# Altium PCB 175-00002 rev 4, PCB, Sinistro Clock Gen.PcbDoc (part 6 of 6)
Units mil, origin at the board's own origin, x right, y up, seen from the top; angles counter-clockwise.
Board outline 5905.51 x 4330.71 mil, 10 copper layers (Top Layer (.GTL), MidLayer1 (*.G1), +12V (*.GP1), -12V (*.GP2), A & GND (*.GP3), Chassis E (*.GP4), +28V & VCC (*.GP5), MidLayer2 (*.G2), MidLayer3 (*.G3), Bottom Layer (.GBL)), stack 64.6 mil thick; 505 components, 332 nets, 1954 pads, 918 vias.
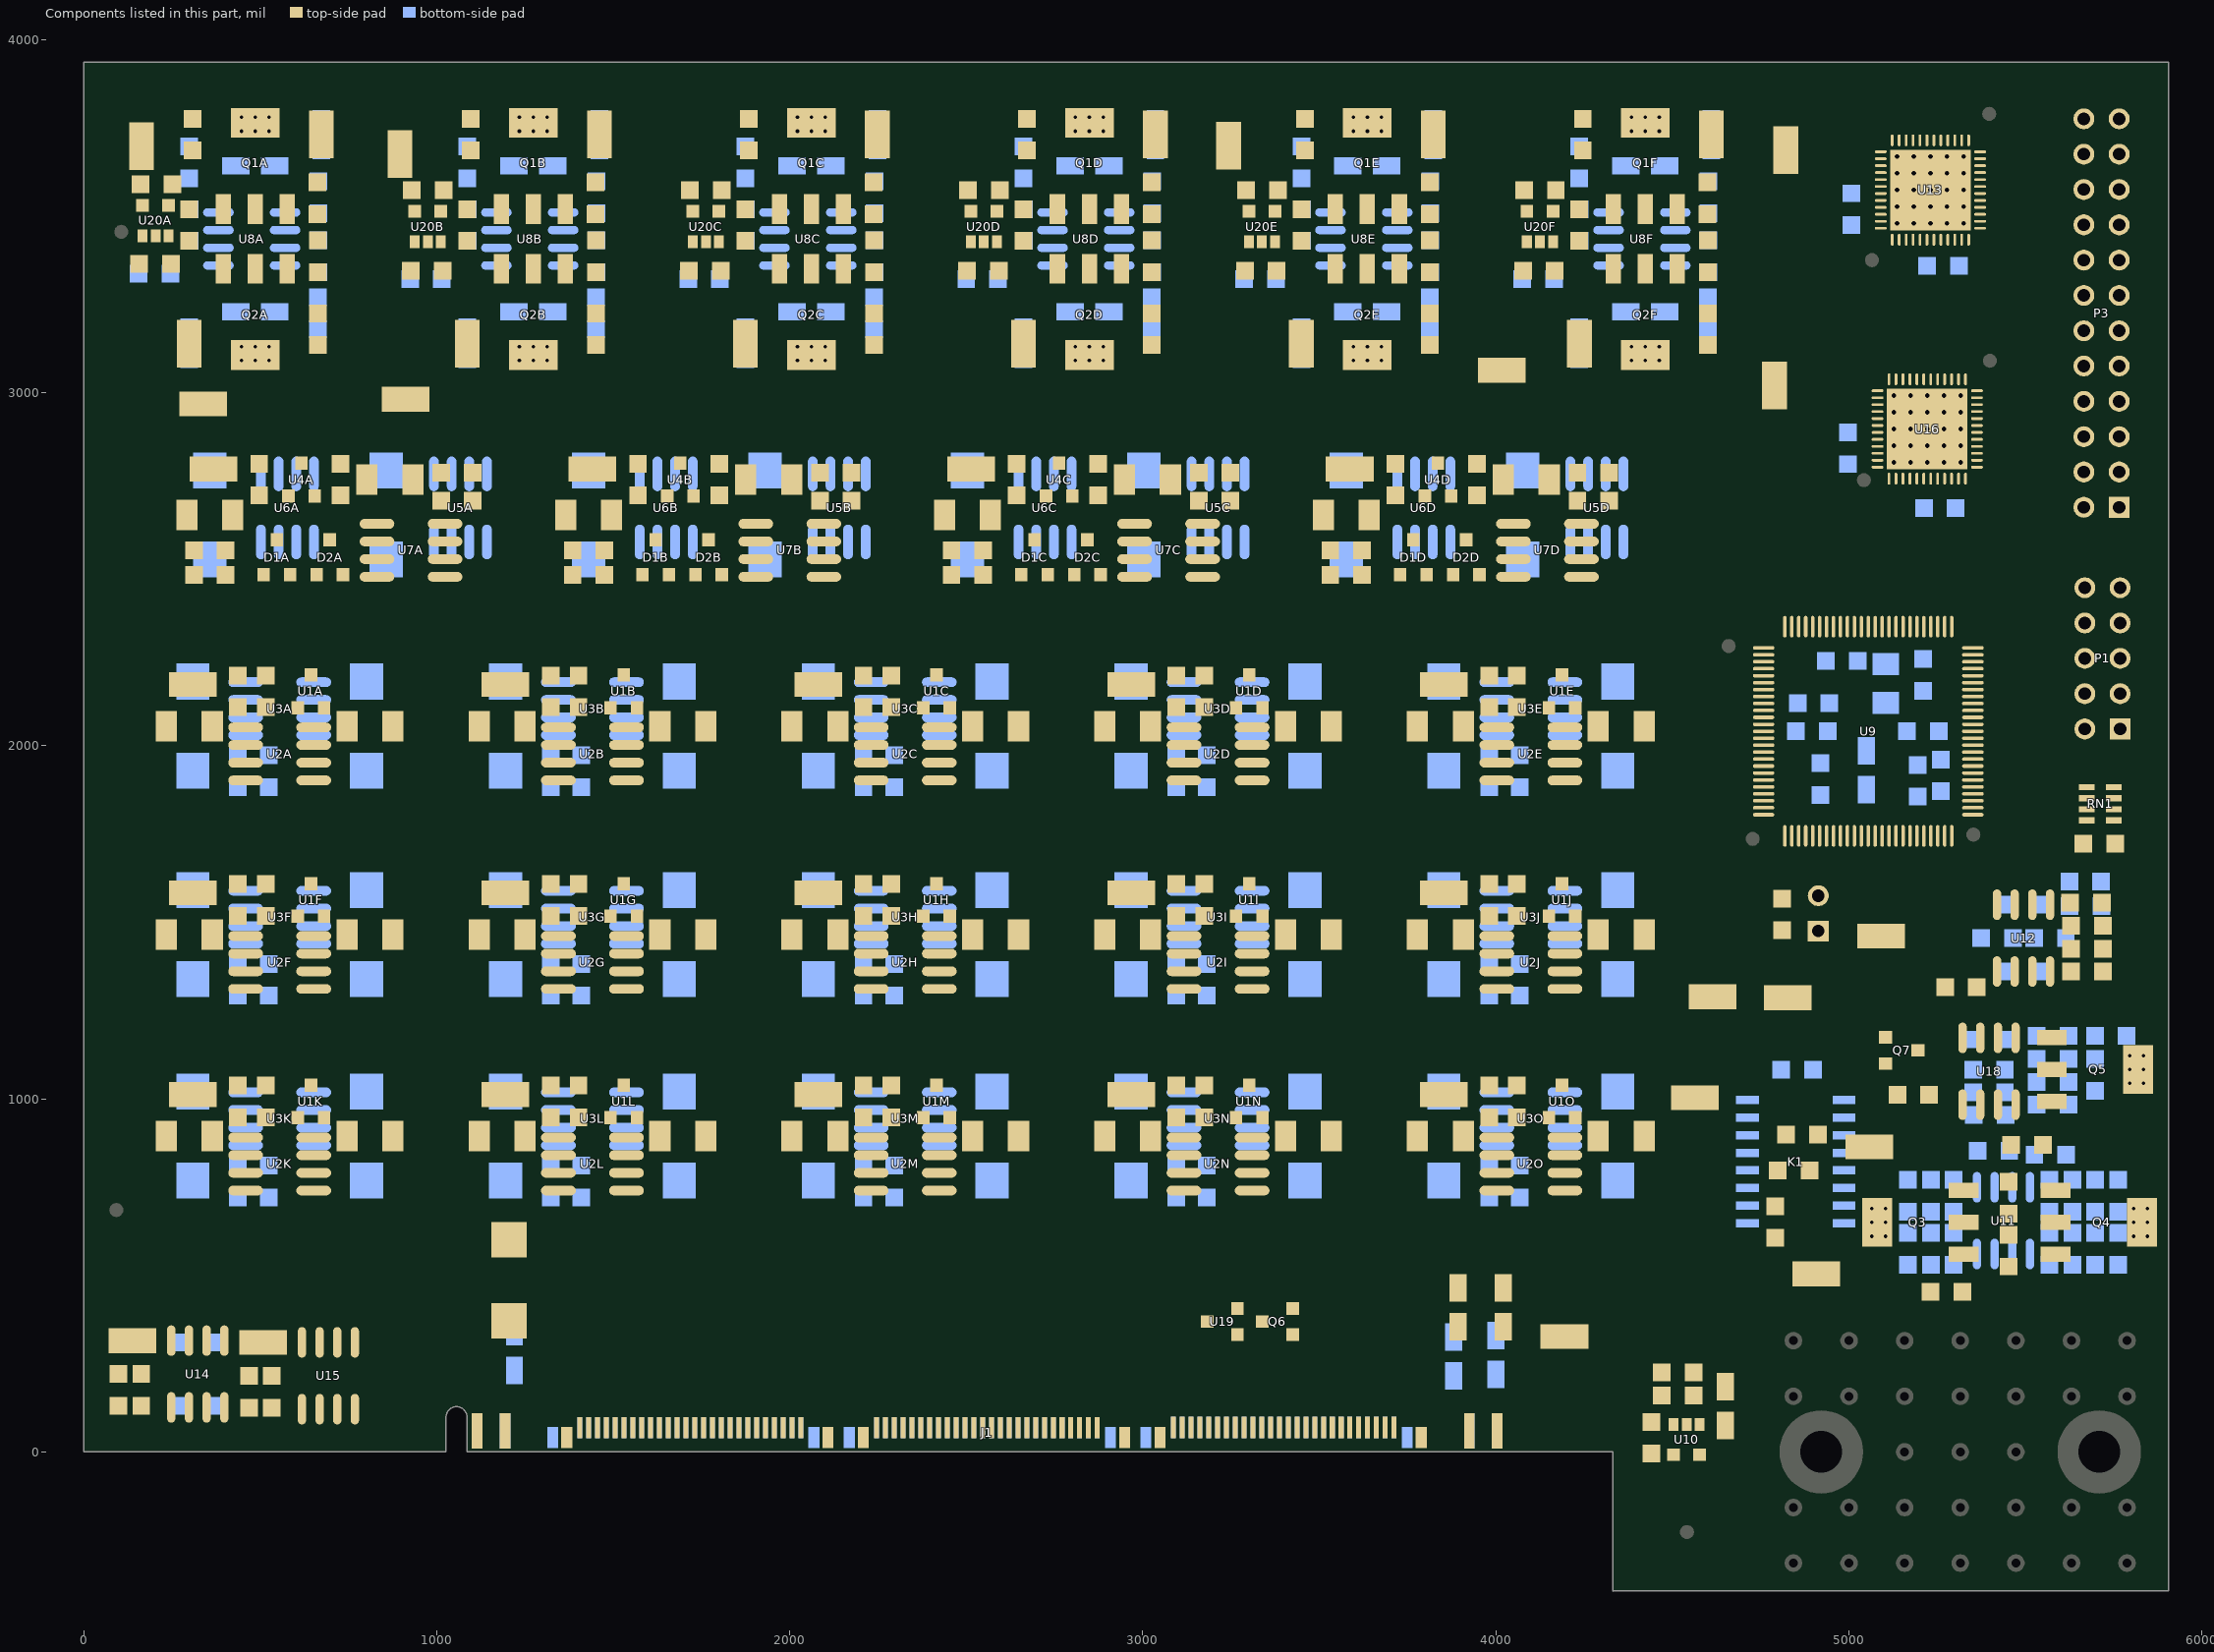
[diagram p14: the components of this part, seen from the top]

## Via types
v1: diameter 24, hole 10, Top Layer (.GTL) to Bottom Layer (.GBL), 918 vias

## Nets (pads, with @x,y where several pads share a name; then routed paths per layer and width w, separated by ;. In a path a pad name is that pad's centre, name@x,y a point inside that pad or via, vN(x,y) a via of type N, cw(c..) or ccw(c..) an arc to the next point about the centre after c; other vN are vias at no path point) (continued)
pads on no net: D1A.2 D1B.2 D1C.2 D1D.2 D2A.2 D2B.2 D2C.2 D2D.2 J1.0 J1.24 J1.26 J1.28 J1.30 J1.34 J1.35 J1.36 J1.37 J1.38 J1.39 J1.40 J1.43 J1.44 J1.45 J1.47 J1.48 J1.50 J1.55 J1.56 J1.57 J1.58 J1.59 J1.60 J1.61 J1.62 J1.65 J1.66 J1.67 J1.68 J1.69 J1.70 J1.71 J1.72 J1.75 J1.76 J1.77 J1.78 J1.79 J1.80 J1.81 J1.82 J1.85 J1.86 J1.87 J1.88 J1.89 J1.90 J1.91 J1.92 J1.96 J1.98 J1.100 J1.102 J1.108 P1.6 P1.7 P1.8 Q1A.2 Q1B.2 Q1C.2 Q1D.2 Q1E.2 Q1F.2 Q2A.2 Q2B.2 Q2C.2 Q2D.2 Q2E.2 Q2F.2 Q3.2 Q4.2 Q5.2 U2A.1 U2A.4 U2A.7 U2B.1 U2B.4 U2B.7 U2C.1 U2C.4 U2C.7 U2D.1 U2D.4 U2D.7 U2E.1 U2E.4 U2E.7 U2F.1 U2F.4 U2F.7 U2G.1 U2G.4 U2G.7 U2H.1 U2H.4 U2H.7 U2I.1 U2I.4 U2I.7 U2J.1 U2J.4 U2J.7 U2K.1 U2K.4 U2K.7 U2L.1 U2L.4 U2L.7 U2M.1 U2M.4 U2M.7 U2N.1 U2N.4 U2N.7 U2O.1 U2O.4 U2O.7 U3A.1 U3A.8 U3B.1 U3B.8 U3C.1 U3C.8 U3D.1 U3D.8 U3E.1 U3E.8 U3F.1 U3F.8 U3G.1 U3G.8 U3H.1 U3H.8 U3I.1 U3I.8 U3J.1 U3J.8 U3K.1 U3K.8 U3L.1 U3L.8 U3M.1 U3M.8 U3N.1 U3N.8 U3O.1 U3O.8 U5A.1 U5A.4 U5A.7 U5B.1 U5B.4 U5B.7 U5C.1 U5C.4 U5C.7 U5D.1 U5D.4 U5D.7 U6A.1 U6A.8 U6B.1 U6B.8 U6C.1 U6C.8 U6D.1 U6D.8 U7A.1 U7A.4 U7A.7 U7B.1 U7B.4 U7B.7 U7C.1 U7C.4 U7C.7 U7D.1 U7D.4 U7D.7 U9.1 U9.2 U9.3 U9.4 U9.5 U9.6 U9.7 U9.8 U9.15 U9.16 U9.17 U9.18 U9.19 U9.20 U9.21 U9.27 U9.28 U9.29 U9.30 U9.33 U9.34 U9.35 U9.36 U9.43 U9.47 U9.48 U9.49 U9.50 U9.91 U9.92 U9.97 U9.98 U9.99 U9.100 U13.3 U13.5 U13.6 U13.16 U13.17 U13.20 U13.21 U13.29 U13.30 U13.31 U13.32 U13.35 U15.1 U15.3 U15.5 U15.7 U15.8 U16.3 U16.5 U16.6 U16.16 U16.17 U16.20 U16.21 U16.29 U16.30 U16.31 U16.32 U16.35
copper on no net: | length 166.9
  Bottom Layer (.GBL) w5: 3465.57,465 ccw(c3439,465) 3465.57,465

## Polygon pours and split planes (outlines as drawn)
E on +12V (*.GP1) (split plane): 5885.42,-373.6 4726.1,-373.6 4726.1,391.89 4730.11,395.9 5885.42,395.9
+12V on +12V (*.GP1) (split plane): 5885.42,406.1 4728,406.1 4726.05,405.71 4724.39,404.6 4717.39,397.6 4716.29,395.95 4715.9,394 4715.9,-373.6 4350.81,-373.6 4350.81,0 4350.42,3.92 4349.28,7.69 4347.42,11.17 4344.92,14.21 4341.88,16.71 4338.4,18.57 4334.63,19.71 4330.71,20.1 1105.9,20.1 1105.9,98.43 1105.86,98.89 1105.57,103.98 1104.64,109.46 1103.1,114.81 1100.97,119.95 1098.28,124.82 1095.06,129.35 1091.35,133.5 1087.21,137.21 1082.67,140.43 1077.8,143.12 1072.66,145.25 1067.32,146.79 1061.83,147.72 1056.28,148.03 1050.72,147.72 1045.24,146.79 1039.89,145.25 1034.75,143.12 1029.89,140.43 1025.35,137.21 1021.2,133.5 1017.49,129.35 1014.27,124.82 1011.58,119.95 1009.45,114.81 1007.91,109.46 1006.98,103.98 1006.8,100.78 1006.78,100.64 1006.77,100.17 1006.69,98.85 1006.65,98.43 1006.65,98.42 1006.65,20.1 20.1,20.1 20.1,3916.1 5885.42,3916.1
E on -12V (*.GP2) (split plane): 5885.42,-373.6 4731.1,-373.6 4731.1,391.9 5885,391.9 5885.42,391.98
-12V on -12V (*.GP2) (split plane): 5885.42,402.02 5885,402.1 4723,402.1 4721.05,401.71 4719.39,400.6 4718.29,398.95 4717.9,397 4718.29,395.05 4719.39,393.4 4720.9,391.89 4720.9,-373.6 4350.81,-373.6 4350.81,0 4350.42,3.92 4349.28,7.69 4347.42,11.17 4344.92,14.21 4341.88,16.71 4338.4,18.57 4334.63,19.71 4330.71,20.1 1105.9,20.1 1105.9,98.43 1105.86,98.89 1105.57,103.98 1104.64,109.46 1103.1,114.81 1100.97,119.95 1098.28,124.82 1095.06,129.35 1091.35,133.5 1087.21,137.21 1082.67,140.43 1077.8,143.12 1072.66,145.25 1067.32,146.79 1061.83,147.72 1056.28,148.03 1050.72,147.72 1045.24,146.79 1039.89,145.25 1034.75,143.12 1029.89,140.43 1025.35,137.21 1021.2,133.5 1017.49,129.35 1014.27,124.82 1011.58,119.95 1009.45,114.81 1007.91,109.46 1006.98,103.98 1006.8,100.78 1006.78,100.64 1006.77,100.17 1006.69,98.85 1006.65,98.43 1006.65,98.42 1006.65,20.1 20.1,20.1 20.1,3916.1 5885.42,3916.1
GND on A & GND (*.GP3) (split plane): 5885.42,239.1 4715,239.1 4713.05,238.71 4711.39,237.6 4710.29,235.95 4709.9,234 4709.9,-373.6 4350.81,-373.6 4350.81,0 4350.42,3.92 4349.28,7.69 4347.42,11.17 4344.92,14.21 4341.88,16.71 4338.4,18.57 4334.63,19.71 4330.71,20.1 1288.09,20.1 1288.09,383.91 3687.91,383.91 3687.91,210 3688.26,207.39 3689.26,204.96 3690.87,202.87 3692.96,201.26 3695.39,200.26 3698,199.91 3700.61,200.26 3703.04,201.26 3705.13,202.87 3705.18,202.91 4183,202.91 4185.61,203.26 4188.04,204.26 4190.13,205.87 4191.73,207.96 4192.74,210.39 4193.09,213 4193.09,387.91 5791,387.91 5793.61,388.26 5796.04,389.26 5798.13,390.87 5799.73,392.96 5800.74,395.39 5801.09,398 5801.09,1495.82 5830.13,1524.87 5831.73,1526.96 5832.32,1528.38 5832.74,1529.39 5833.09,1532 5833.09,1618 5832.74,1620.61 5831.73,1623.04 5830.13,1625.13 5828.04,1626.73 5825.61,1627.74 5823,1628.09 4979,1628.09 4976.39,1627.74 4973.96,1626.73 4971.87,1625.13 4970.87,1624.13 4969.26,1622.04 4968.26,1619.61 4967.91,1617 4968.26,1614.39 4969.26,1611.96 4970.87,1609.87 4972.9,1608.31 4972.9,1530.1 4854.1,1530.1 4854.1,1608 4853.86,1609.19 4854.04,1609.27 4856.13,1610.87 4857.73,1612.96 4858.74,1615.39 4859.09,1618 4858.74,1620.61 4857.73,1623.04 4856.13,1625.13 4854.04,1626.73 4851.61,1627.74 4849,1628.09 4499.09,1628.09 4499.09,2550.91 5885.42,2550.91
E on A & GND (*.GP3) (split plane): 5885.42,-373.6 4720.1,-373.6 4720.1,228.9 5885.42,228.9
A on A & GND (*.GP3) (split plane): 5885.42,2571.09 4489,2571.09 4486.39,2570.74 4483.96,2569.73 4481.87,2568.13 4480.26,2566.04 4479.26,2563.61 4478.91,2561 4478.91,1618 4479.26,1615.39 4480.26,1612.96 4481.87,1610.87 4483.96,1609.27 4486.39,1608.26 4489,1607.91 4843.9,1607.91 4843.9,1525 4844.29,1523.05 4845.39,1521.4 4847.05,1520.29 4849,1519.9 4976,1519.9 4977.95,1520.29 4979.6,1521.4 4980.41,1522.59 4981.6,1523.4 4982.71,1525.05 4983.1,1527 4983.1,1607.91 5812.91,1607.91 5812.91,1536.18 5783.87,1507.13 5782.26,1505.04 5781.26,1502.61 5780.91,1500 5780.91,408.09 4183,408.09 4180.39,407.74 4177.96,406.74 4175.87,405.13 4174.26,403.04 4173.26,400.61 4172.91,398 4172.91,223.09 3708.09,223.09 3708.09,389.82 3709.13,390.87 3710.73,392.96 3711.74,395.39 3712.09,398 3711.74,400.61 3710.73,403.04 3709.13,405.13 3707.04,406.74 3704.61,407.74 3702,408.09 3699.39,407.74 3696.96,406.74 3694.87,405.13 3693.82,404.09 1286.18,404.09 1285.13,405.13 1283.04,406.74 1280.61,407.74 1278,408.09 1275.39,407.74 1272.96,406.74 1270.87,405.13 1269.26,403.04 1268.26,400.61 1267.91,398 1267.91,20.1 1105.9,20.1 1105.9,98.43 1105.86,98.89 1105.57,103.98 1104.64,109.46 1103.1,114.81 1100.97,119.95 1098.28,124.82 1095.06,129.35 1091.35,133.5 1087.21,137.21 1082.67,140.43 1077.8,143.12 1072.66,145.25 1067.32,146.79 1061.83,147.72 1056.28,148.03 1050.72,147.72 1045.24,146.79 1039.89,145.25 1034.75,143.12 1029.89,140.43 1025.35,137.21 1021.2,133.5 1017.49,129.35 1014.27,124.82 1011.58,119.95 1009.45,114.81 1007.91,109.46 1006.98,103.98 1006.8,100.78 1006.78,100.64 1006.77,100.17 1006.69,98.85 1006.65,98.43 1006.65,98.42 1006.65,20.1 20.1,20.1 20.1,3916.1 5885.42,3916.1
Q1_CE on Chassis E (*.GP4) (split plane): 4030.33,3449.98 3253.13,3449.98 3253.13,3833.48 4030.33,3833.48
Q1_CF on Chassis E (*.GP4) (split plane): 4817.74,3449.98 4040.53,3449.98 4040.53,3833.48 4817.74,3833.48
Q1_CD on Chassis E (*.GP4) (split plane): 3242.93,3449.98 2465.73,3449.98 2465.73,3833.48 3242.93,3833.48
Q2_CE on Chassis E (*.GP4) (split plane): 4030.33,3056.28 3253.13,3056.28 3253.13,3439.78 4030.33,3439.78
NetQ5_4 on Chassis E (*.GP4) (split plane): 5885.42,881.1 5376.1,881.1 5376.1,1271.9 5885.42,1271.9
NetQ4_4 on Chassis E (*.GP4) (split plane): 5885.42,412.1 5376.1,412.1 5376.1,870.9 5885.42,870.9
Q2_CF on Chassis E (*.GP4) (split plane): 4817.74,3056.28 4040.53,3056.28 4040.53,3439.78 4817.74,3439.78
NetQ3_4 on Chassis E (*.GP4) (split plane): 5365.9,412.1 4836.1,412.1 4836.1,870.9 5365.9,870.9
Q1_CC on Chassis E (*.GP4) (split plane): 2455.53,3449.98 1678.33,3449.98 1678.33,3833.48 2455.53,3833.48
Q2_CC on Chassis E (*.GP4) (split plane): 2455.53,3056.28 1678.33,3056.28 1678.33,3439.78 2455.53,3439.78
Q1_CA on Chassis E (*.GP4) (split plane): 880.73,3449.98 103.52,3449.98 103.52,3833.48 880.73,3833.48
Q1_CB on Chassis E (*.GP4) (split plane): 1668.13,3449.98 890.92,3449.98 890.92,3833.48 1668.13,3833.48
E on Chassis E (*.GP4) (split plane): 5885.42,1282.1 5371,1282.1 5369.05,1281.71 5367.39,1280.6 5366.29,1278.95 5365.9,1277 5365.9,881.1 4831,881.1 4829.05,880.71 4827.39,879.6 4826.29,877.95 4825.9,876 4825.9,407 4826.29,405.05 4827.39,403.4 4829.05,402.29 4831,401.9 5885.42,401.9 5885.42,-373.6 4350.81,-373.6 4350.81,0 4350.42,3.92 4349.28,7.69 4347.42,11.17 4344.92,14.21 4341.88,16.71 4338.4,18.57 4334.63,19.71 4330.71,20.1 1105.9,20.1 1105.9,98.43 1105.86,98.89 1105.57,103.98 1104.64,109.46 1103.1,114.81 1100.97,119.95 1098.28,124.82 1095.06,129.35 1091.35,133.5 1087.21,137.21 1082.67,140.43 1077.8,143.12 1072.66,145.25 1067.32,146.79 1061.83,147.72 1056.28,148.03 1050.72,147.72 1045.24,146.79 1039.89,145.25 1034.75,143.12 1029.89,140.43 1025.35,137.21 1021.2,133.5 1017.49,129.35 1014.27,124.82 1011.58,119.95 1009.45,114.81 1007.91,109.46 1006.98,103.98 1006.8,100.78 1006.78,100.64 1006.77,100.17 1006.69,98.85 1006.65,98.43 1006.65,98.42 1006.65,20.1 20.1,20.1 20.1,3916.1 5885.42,3916.1
Q2_CD on Chassis E (*.GP4) (split plane): 3242.93,3056.28 2465.73,3056.28 2465.73,3439.78 3242.93,3439.78
Q2_CA on Chassis E (*.GP4) (split plane): 880.73,3056.28 103.52,3056.28 103.52,3439.78 880.73,3439.78
Q2_CB on Chassis E (*.GP4) (split plane): 1668.13,3056.28 890.92,3056.28 890.92,3439.78 1668.13,3439.78
+28V on +28V & VCC (*.GP5) (split plane): 5885.42,253.09 4721.89,253.09 4721.04,253.74 4718.61,254.74 4716,255.09 4713.39,254.74 4710.96,253.74 4710.11,253.09 1077.09,253.09 1077.09,330.11 1077.73,330.96 1078.74,333.39 1079.09,336 1079.09,361.91 4714,361.91 4716.61,362.26 4719.04,363.26 4721.13,364.87 4723.13,366.87 4724.73,368.96 4725.32,370.38 4725.74,371.39 4726.09,374 4726.09,1334.91 5885.42,1334.91
E on +28V & VCC (*.GP5) (split plane): 5885.42,-373.6 4723.1,-373.6 4723.1,232.91 5885.42,232.91
VCC on +28V & VCC (*.GP5) (split plane): 5885.42,1355.09 4716,1355.09 4713.39,1354.74 4710.96,1353.73 4708.87,1352.13 4707.26,1350.04 4706.26,1347.61 4705.91,1345 4705.91,382.09 1073.19,382.09 1071.61,382.74 1069,383.09 1066.39,382.74 1063.96,381.74 1061.87,380.13 1060.26,378.04 1059.26,375.61 1058.91,373 1058.91,340.89 1058.26,340.04 1057.26,337.61 1056.91,335 1056.91,243 1057.26,240.39 1058.26,237.96 1059.87,235.87 1061.96,234.26 1064.39,233.26 1067,232.91 4712.9,232.91 4712.9,-373.6 4350.81,-373.6 4350.81,0 4350.42,3.92 4349.28,7.69 4347.42,11.17 4344.92,14.21 4341.88,16.71 4338.4,18.57 4334.63,19.71 4330.71,20.1 1105.9,20.1 1105.9,98.43 1105.86,98.89 1105.57,103.98 1104.64,109.46 1103.1,114.81 1100.97,119.95 1098.28,124.82 1095.06,129.35 1091.35,133.5 1087.21,137.21 1082.67,140.43 1077.8,143.12 1072.66,145.25 1067.32,146.79 1061.83,147.72 1056.28,148.03 1050.72,147.72 1045.24,146.79 1039.89,145.25 1034.75,143.12 1029.89,140.43 1025.35,137.21 1021.2,133.5 1017.49,129.35 1014.27,124.82 1011.58,119.95 1009.45,114.81 1007.91,109.46 1006.98,103.98 1006.8,100.78 1006.78,100.64 1006.77,100.17 1006.69,98.85 1006.65,98.43 1006.65,98.42 1006.65,20.1 20.1,20.1 20.1,3916.1 5885.42,3916.1

## Other copper
Top Layer (.GTL):
  rectangle net E: 4724.41,-393.7 5905.51,393.7
  text "*.GTL - TOP LAYER GERBER DATA" at 1372,-1734.01 h80
MidLayer1 (*.G1):
  text "*.G1 - MID LAYER 1 GERBER DATA" at 1372,-1734.01 h80
MidLayer2 (*.G2):
  text "*.G2 - MID LAYER 2 GERBER DATA" at 1372,-1734.01 h80
MidLayer3 (*.G3):
  text "*.G3 - MID LAYER 3 GERBER DATA" at 1372,-1734.01 h80
Bottom Layer (.GBL):
  rectangle net E: 4724.41,-393.7 5905.51,393.7
  text "175-00002 Rev 4, SINISTRO CLK BOARD" at 3518.81,517.22 h30
  text "Las Cumbres Observatory" at 3205,458 h30
  text "c  2013" at 3451,454 h30
  text "*.GBL - BOTTOM LAYER GERBER DATA" at 1372,-1734.01 h80
+12V (*.GP1) (plane layer: these items are gaps in the copper):
  lines w10: 4721,-394.51 4721,394 4728,401 5901.51,401 5905.51,405
  text "*.GP1 - INTERNAL PLANE LAYER 1 GERBER DATA" at 1372,-1734.01 h80
-12V (*.GP2) (plane layer: these items are gaps in the copper):
  lines w10: 4726,-394.51 4726,394 4723,397 5885,397
  text "*.GP2 - INTERNAL PLANE LAYER 2 GERBER DATA" at 1372,-1734.01 h80
Chassis E (*.GP4) (plane layer: these items are gaps in the copper):
  lines w10: 5371,407 5371,1277 5898.51,1277 5905.51,1284 ; 5890,876 4831,876 4831,407 5899.51,407 ; 98.43,3444.88 98.43,3838.58 885.83,3838.58 ; 98.43,3444.88 98.43,3051.18 885.83,3051.18 ; 98.43,3444.88 885.83,3444.88 ; 885.83,3051.18 1673.23,3051.18 ; 885.83,3051.18 885.83,3444.88 ; 885.83,3444.88 885.83,3838.58 ; 885.83,3444.88 1673.23,3444.88 ; 885.83,3838.58 1673.23,3838.58 ; 1673.23,3051.18 2460.63,3051.18 ; 1673.23,3051.18 1673.23,3444.88 ; 1673.23,3444.88 1673.23,3838.58 ; 1673.23,3444.88 2460.63,3444.88 ; 1673.23,3838.58 2460.63,3838.58 ; 2460.63,3051.18 3248.03,3051.18 ; 2460.63,3051.18 2460.63,3444.88 ; 2460.63,3444.88 2460.63,3838.58 ; 2460.63,3444.88 3248.03,3444.88 ; 2460.63,3838.58 3248.03,3838.58 ; 3248.03,3051.18 4035.43,3051.18 ; 3248.03,3051.18 3248.03,3444.88 ; 3248.03,3444.88 3248.03,3838.58 ; 3248.03,3444.88 4035.43,3444.88 ; 3248.03,3838.58 4035.43,3838.58 ; 4035.43,3051.18 4822.83,3051.18 4822.83,3444.88 ; 4035.43,3051.18 4035.43,3444.88 ; 4035.43,3444.88 4035.43,3838.58 ; 4035.43,3444.88 4822.83,3444.88 ; 4035.43,3838.58 4822.83,3838.58 4822.83,3444.88
  text "*.GP4 - INTERNAL PLANE LAYER 4 GERBER DATA" at 1372,-1734.01 h80
A & GND (*.GP3) (plane layer: these items are gaps in the copper):
  lines w7: 4976,1525 4978,1527 ; 4978,1617 4979,1618
  lines w10: 4715,-394.51 4715,234 5905.51,234 ; 4976,1525 4849,1525 ; 4978,1527 4978,1617 ; 4849,1525 4849,1608 4849,1525
  lines w20: 1278,0 1278,398 1282,394 3698,394 ; 3702,398 3698,394 ; 4849,1618 4489,1618 4489,2561 5905.51,2561 ; 4978,1617 4979,1618 5823,1618 5823,1532 5791,1500 5791,398 4183,398 4183,213 3701,213 3698,210 3698,394 ; 5903.51,1617 5905.51,1619 ; 5903.51,1617 5905.51,1619 ; 5903.51,1617 5905.51,1619
  text "*.GP3- INTERNAL PLANE LAYER 3 GERBER DATA" at 1372,-1734.01 h80
+28V & VCC (*.GP5) (plane layer: these items are gaps in the copper):
  lines w10: 4718,243 4718,-376 4721,-379
  lines w20: 1067,335 1067,243 4718,243 ; 1068,335 1069,336 1069,373 1070,372 4714,372 4716,374 4716,1345 5903.51,1345 5905.51,1343 ; 5899.51,243 4718,243 ; 4716,245 4718,243 ; 4716,245 4718,243 ; 4716,245 4718,243
  text "*.GP5- INTERNAL PLANE LAYER 5 GERBER DATA" at 1372,-1734.01 h80

## Silkscreen, mask and mechanical layers (free items; w line width, h text height)
Top Overlay:
  rectangle: 2403,275 2643,440
  text "AGND" at 3209,3796.03 h30
  text "AGND" at 111,3787 h30
  text "AGND" at 4801,3768 h30
  text "AGND" at 839,3755 h30
  text "+5ANA" at 3941,3113.42 h30
  text "DGND" at 4739,3106 h30
  text "-12V" at 849,3027 h30
  text "+12V" at 279,3012 h30
  text "JTAG" at 5574,1982 h50 r90
  text "D" at 4989,1562 h30
  text "VCC" at 5047,1510 h30
  text "A" at 4985,1464 h30
  text "+28V" at 4773,1334 h30
  text "780-00002, SCH, SINISTRO CLOCK GEN." at 1783,497 h60
  text "-5ANA" at 4110,384 h30
  text "SCH Rev" at 1961,327 h60
  text "*.GTO - TOP OVERLAY GERBER DATA" at 1372,-1734.01 h80
Bottom Overlay:
  text "*GBO BOTTOM OVERLAY GERBER DATA" at 1372,-1734.01 h80
Top Paste:
  text "*.GTP - TOP-SIDE SOLDER PASTE MASK" at 1371.99,-1734.02 h80
Bottom Paste:
  text "*.GBP - BOTTOM-SIDE SOLDER PASTE MASK" at 1371.99,-1734.02 h80
Top Solder:
  rectangle: 4724.41,-393.7 5905.51,393.7
  text "*.GTS - TOP SOLDER MASK GERBER DATA" at 1372,-1734.01 h80
Bottom Solder:
  rectangle: 4724.41,-393.7 5905.51,393.7
  rectangle: 2474,420 3573,583
  text "*.GBS - BOTTOM SOLDER MASK GERBER DATA" at 1372,-1734.01 h80
Mechanical 1:
  lines w29.53: 811.02,0 0,0 0,3936.2 4724.41,3936.2 5905.51,3936.2 5905.51,-393.7 4330.71,-393.7 ; 4330.71,-394.51 4330.71,0
Mechanical 2:
  lines w10: -7631,-8396 13369,-8396 13369,7604 -7631,7604 -7631,-8396 ; 9314,-8290 ccw(c9364,-8290) 9364,-8340 9694,-8340 ccw(c9694,-8300) 9734,-8300 9734,-8130 ccw(c9694,-8130) 9694,-8090 9314,-8090 9314,-8290 ; 9314,-8000 ccw(c9364,-8000) 9364,-8050 13264,-8050 ccw(c13264,-8000) 13314,-8000 13314,-7810 ccw(c13264,-7810) 13264,-7760 9314,-7760 9314,-8000 ; 9314,-7670 ccw(c9364,-7670) 9364,-7720 11244,-7720 ccw(c11244,-7670) 11294,-7670 11294,-7520 ccw(c11244,-7520) 11244,-7470 9314,-7470 9314,-7670 ; 9314,-7390 ccw(c9354,-7390) 9354,-7430 10164,-7430 ccw(c10164,-7380) 10214,-7380 10214,-7230 ccw(c10164,-7230) 10164,-7180 9314,-7180 9314,-7390 ; 9774,-8300 ccw(c9814,-8300) 9814,-8340 11774,-8340 ccw(c11774,-8300) 11814,-8300 11814,-8130 ccw(c11774,-8130) 11774,-8090 9774,-8090 9774,-8300 ; 10254,-7380 ccw(c10304,-7380) 10304,-7430 11244,-7430 ccw(c11244,-7380) 11294,-7380 11294,-7230 ccw(c11244,-7230) 11244,-7180 10254,-7180 10254,-7380 ; 11334,-7670 ccw(c11384,-7670) 11384,-7720 13264,-7720 ccw(c13264,-7670) 13314,-7670 13314,-7520 ccw(c13264,-7520) 13264,-7470 11334,-7470 11334,-7670 ; 11334,-7380 ccw(c11384,-7380) 11384,-7430 12324,-7430 ccw(c12324,-7380) 12374,-7380 12374,-7230 ccw(c12324,-7230) 12324,-7180 11334,-7180 11334,-7380 ; 11854,-8290 ccw(c11904,-8290) 11904,-8340 12234,-8340 ccw(c12234,-8300) 12274,-8300 12274,-8130 ccw(c12234,-8130) 12234,-8090 11854,-8090 11854,-8290 ; 12314,-8300 ccw(c12354,-8300) 12354,-8340 13264,-8340 ccw(c13264,-8290) 13314,-8290 13314,-8140 ccw(c13264,-8140) 13264,-8090 12314,-8090 12314,-8300 ; 12414,-7380 ccw(c12464,-7380) 12464,-7430 13264,-7430 ccw(c13264,-7380) 13314,-7380 13314,-7230 ccw(c13264,-7230) 13264,-7180 12414,-7180 12414,-7380
  lines w14: -6891,-3333 -2381,-3333 ; -6891,-3085.3 -2381,-3085.3 ; -6951,-5745 ccw(c-6871,-5745) -6871,-5825 -2401,-5825 ccw(c-2401,-5745) -2321,-5745 -2321,-2923 ccw(c-2401,-2923) -2401,-2843 -6871,-2843 ccw(c-6871,-2923) -6951,-2923 -6951,-5745
  lines w20: -7610.94,-7750.12 cw(c-7561,-7825) -7561,-7735 -7101,-7735 cw(c-7101,-7825) -7011,-7825 -7011,-7875 ccw(c-7001,-7875) -7001,-7885 -4361,-7885 cw(c-4361,-7975) -4271,-7975 -4271,-8315 cw(c-4361,-8315) -4286.12,-8364.94 ; 9270.17,-8379.98 cw(c9364,-8290) 9234,-8290 9234,-6620 cw(c9364,-6620) 9364,-6490 13264,-6490 cw(c13264,-6620) 13352.66,-6524.92 ; -7611,-8315 ccw(c-7561,-8315) -7561,-8365 -4361,-8365 ccw(c-4361,-8315) -4311,-8315 -4311,-7975 ccw(c-4361,-7975) -4361,-7925 -7001,-7925 cw(c-7001,-7875) -7051,-7875 -7051,-7825 ccw(c-7101,-7825) -7101,-7775 -7561,-7775 ccw(c-7561,-7825) -7611,-7825 -7611,-8315 ; -101,-8216 ccw(c29,-8216) 29,-8346 4769,-8346 ccw(c4769,-8216) 4899,-8216 4899,-6626 ccw(c4769,-6626) 4769,-6496 29,-6496 ccw(c29,-6626) -101,-6626 -101,-8216 ; 9274,-8290 ccw(c9364,-8290) 9364,-8380 13264,-8380 ccw(c13264,-8290) 13354,-8290 13354,-6620 ccw(c13264,-6620) 13264,-6530 9364,-6530 ccw(c9364,-6620) 9274,-6620 9274,-8290
  lines w24: 2449,-8186 2599,-8186 ; 2449,-7936 2599,-7936 ; 2449,-7686 2599,-7686 ; 2449,-7436 2599,-7436 ; 2449,-7186 2599,-7186
  lines w30: -8131,-8896 13869,-8896 13869,8104 -8131,8104 -8131,-8896
  lines w50: 9459,-7031 11109,-7031 ; 9459,-6651 11109,-6651 ; 11109,-7031 9449,-7031 9449,-6651 11109,-6651 ; 11109,-7031 11109,-6651
  text "NOTES (UNLESS OTHERWISE SPECIFIED):" at -7311,7080 h90
  text "GENERAL" at -7211,6880 h90
  text "1)" at -7111,6679.95 h75
  text "PCB IS 10-LAYER, .062\" THICK." at -6911,6679.97 h75
  text "2)" at -7111,6529.95 h75
  text "CONSTRUCTION IS SOLDER-MASK-OVER-BARE-COPPER (SMOBC)." at -6911,6529.95 h75
  text "3)" at -7111,6379.95 h75
  text "ACCEPTABILITY SHALL BE BASED ON IPC-A-600, CLASS 2." at -6911,6379.95 h75
  text "4)" at -7111,6229.95 h75
  text "THE FOLLOWING GERBER RS274X PHOTO TOOL FILES SHALL BE USED TO DEFINE ALL CIRCUIT FEATURES:" at -6911,6229.95 h75
  text "*.GTL - TOP LAYER GERBER DATA" at -6737,6040 h80
  text "*.G1 - MID LAYER 1 GERBER DATA" at -6737,5849.73 h80
  text "*.GP1- INTERNAL PLANE LAYER 1 GERBER DATA" at -6737,5659.47 h80
  text "*.GP2 - INTERNAL PLANE LAYER 2 GERBER DATA" at -6737,5469.2 h80
  text "*.GP3- INTERNAL PLANE LAYER 3 GERBER DATA" at -6737,5278.93 h80
  text "*.GP4 - INTERNAL PLANE LAYER 4 GERBER DATA" at -6737,5088.67 h80
  text "*.GP5 - INTERNAL PLANE LAYER 5 GERBER DATA" at -6737,4898.4 h80
  text "*.G2 - MID LAYER 2 GERBER DATA" at -6737,4708.13 h80
  text "*.G3 - MID LAYER 3 GERBER DATA" at -6737,4517.87 h80
  text "*.GBL - BOTTOM LAYER GERBER DATA" at -6737,4327.6 h80
  text "*GBO - BOTTOM OVERLAY GERBER DATA" at -6737,4137.33 h80
  text "*.GBP - BOTTOM-SIDE SOLDER PASTE MASK" at -6737.01,3947.06 h80
  text "*.GBS - BOTTOM SOLDER MASK GERBER DATA" at -6737,3756.8 h80
  text "*.GTO - TOP OVERLAY GERBER DATA" at -6737,3566.53 h80
  text "*.GTP - TOP-SIDE SOLDER PASTE MASK" at -6737.01,3376.26 h80
  text "*.GTS - TOP SOLDER MASK GERBER DATA" at -6737,3186 h80
  text "5)" at -7173,2964.23 h75
  text "THE PHOTO TOOL SHALL NOT BE COMPENSATED WITHOUT PRIOR ENGINEERING APPROVAL." at -6973,2964.23 h75
  text "PCB DESIGNER: RICH LOBDILL   PH (805) 880-1621  FAX (805) 961-1792." at -6973,2814.28 h75
  text "FABRICATION TOLERANCES" at -7153,2522 h90
  text "6)" at -7053,2321.95 h75
  text "END PRODUCT CONDUCTOR WIDTHS AND PAD DIAMETERS SHALL NOT VARY MORE THAN" at -6853,2321.95 h75
  text "0.002\" FROM THE 1:1 DIMENSIONS OF THE MASTER ARTWORK." at -6853,2172 h75
  text "7)" at -7053,2021.95 h75
  text "THE CONDUCTIVE PATTERN SHALL BE POSITIONED SO THAT THE LOCATION OF ANY PAD OR" at -6853,2021.95 h75
  text "LAND SHALL BE WITHIN 0.005\" DIAMETER TO THE TRUE POSITION OF THE HOLE IT CIRCUMSCRIBES." at -6853,1872 h75
  text "8.1)" at -7078,1741 h75
  text "DRILL TOLERANCES +/- 0.003\"" at -6851,1733 h75
  text "8.2)" at -7090,1597 h75
  text "ALL DRILL HOLE SIZES AND TOLERANCES APPLY AFTER PLATING." at -6853,1589.95 h75
  text "9)" at -7053,1439.95 h75
  text "THE MINIMUM ANNULAR RING SHALL BE 0.005\"." at -6853,1439.95 h75
  text "10)" at -7108,1289.95 h75
  text "BOW AND TWIST SHALL NOT EXCEED 0.010\" PER INCH." at -6853,1289.95 h75
  text "11)" at -7098,1139.95 h75
  text "FOR PCB ROUTING DIMENSIONS: .XXX = +/-.005\"  .XX = +/-.020\"" at -6853,1139.95 h75
  text "MATERIAL" at -7153,940 h90
  text "12)" at -7108,739.95 h75
  text "BASE MATERIAL IS FR4 EPOXY FIBERGLASS" at -6846,734 h75
  text "SEE STACK-UP LEGEND FOR COPPER CLADDING CALL OUTS" at -6846,594 h75
  text "13)" at -7108,589.95 h75
  text "PLATING" at -7153,390 h90
  text "14)" at -7108,194.95 h75
  text "ALL HOLES AND CONDUCTIVE SURFACES SHALL BE PLATED WITH A MINIMUM OF 0.001\" COPPER." at -6853,194.95 h75
  text "15)" at -7108,44.95 h75
  text "AFTER SOLDERMASK, ALL EXPOSED HOLES AND CONDUCTIVE SURFACES SHALL BE COATED" at -6853,44.95 h75
  text "WITH A GOLD IMMERSION PLATING TO PRESERVE SOLDERABILITY." at -6846,-106 h75
  text "COATINGS" at -7153,-305 h90
  text "16)" at -7103,-500.05 h75
  text "THE SOLDERMASK SHALL BE BLACK LIQUID PHOTO-IMAGEABLE PER IPC-SM-840, TYPE-B, CLASS 2." at -6853,-500.05 h75
  text "17)" at -7108,-650.05 h75
  text "THE SOLDERMASK REGISTRATION ALLOWANCE IS 0.003\".  THERE SHALL BE NO SOLDERMASK ON" at -6853,-650.05 h75
  text "ANY SOLDER PAD OR LAND." at -6853,-800.05 h75
  text "MARKING" at -7153,-1000 h90
  text "18)" at -7108,-1195.05 h75
  text "THE LEGEND SHALL BE SCREEN-PRINTED USING PERMANENT YELLOW EPOXY INK." at -6853,-1195.05 h75
  text "19)" at -7108,-1345.05 h75
  text "THE SCREEN PRINTING REGISTRATION ALLOWANCE IS 0.007\".  THERE SHALL BE NO INK ON ANY" at -6853,-1345.05 h75
  text "SOLDER PAD OR LAND." at -6853,-1495 h75
  text "20)" at -7118,-1645.05 h75
  text "THE VENDOR CODE AND UL FLAMMABILITY RATING MAY BE ETCHED IN THE FOIL OR MARKED IN" at -6853,-1645.05 h75
  text "PERMANENT EPOXY INK (VENDOR'S OPTION)." at -6853,-1795 h75
  text "ELECTRICAL TESTING" at -7153,-1995 h90
  text "21)" at -7108,-2190.05 h75
  text "ALL BOARDS SHALL BE ELECTRICALLY TESTED TO THE SUPPLIED IPC-D-356A NET LIST" at -6853,-2190.05 h75
  text "FOR CONTINUITY, OPENS AND SHORTS." at -6853,-2340 h75
  text "Layer Stack Up Detail for: 780-00002 rev 4" at -6891,-3026.75 h87
  text "Layer" at -6891,-3177.8 h57
  text "Copper cladding" at -4860,-3237 h75
  text "Name" at -6891,-3291.8 h57
  text "Top Layer (.GTL)" at -6891,-3454.25 h80
  text "1/2 oz. (1 oz. Finished)" at -4803,-3482 h80
  text "1/2 oz" at -4794,-3665 h80
  text "MidLayer1 (*.G1)" at -6891,-3682.75 h80
  text "1/2 oz" at -4794,-3886 h80
  text "+12V (*.GP1)" at -6891,-3911.25 h80
  text "1/2 oz" at -4766,-4079 h80
  text "-12V (*.GP2)" at -6891,-4139.75 h80
  text "1/2 oz" at -4766,-4333 h80
  text "A & GND (*.GP3)" at -6891,-4368.25 h80
  text "2 oz." at -4991,-4577 h80
  text "Chassis E (*.GP4)" at -6891,-4596.75 h80
  text "2 oz." at -4987,-4822 h80
  text "+28V & VCC (*.GP5)" at -6891,-4825.25 h80
  text "1/2 oz" at -4803,-5028 h80
  text "MidLayer2 (*.G2)" at -6891,-5053.75 h80
  text "MidLayer3 (*.G3)" at -6891,-5282.25 h80
  text "1/2 oz" at -4808,-5301 h80
  text "Bottom Layer (.GBL)" at -6891,-5510.75 h80
  text "1/2 oz. (1 oz. Finished)" at -4789,-5513 h80
  text "Las Cumbres Observatory, Inc." at 11279,-6671 h90
  text "Las Cumbres Observatory" at 9509,-6791 h150
  text "PRIMARY PCB SPECIFICATIONS" at 346,-6806 h200
  text "6740 Cortona Dr." at 11719,-6825 h90
  text "Global Telescope Network" at 9669,-6951 h125
  text "Goleta, CA 93117" at 11669,-6975 h90
  text "(REFER TO COMPLETE SPEC LISTING AT LEFT FOR FURTHER DETAILS)" at -1,-7011 h100
  text "www.lcogt.net" at 11809,-7121 h90
  text "DATE" at 9334,-7231.8 h32
  text "DESIGNED" at 10274,-7231.8 h32
  text "DRAWN" at 11354,-7231.8 h32
  text "SCALE" at 12434,-7231.8 h32
  text "NUMBER OF LAYERS" at 99,-7261 h150
  text "10" at 3649,-7261.02 h150
  text "Rich Lobdill" at 11659,-7331 h55
  text "Rich Lobdill" at 10534,-7336 h55
  text "1 : 1" at 12719,-7350 h90
  text "1/2/2013" at 9364,-7357 h90
  text "FINISHED THICKNESS" at 99,-7511 h150
  text ".062\"" at 3474,-7511 h150
  text "CHECKED/DATE" at 9334,-7521.8 h32
  text "APPROVED/DATE" at 11354,-7521.8 h32
  text "BASE MATERIAL" at 99,-7761 h150
  text "FR4" at 3399,-7761 h150
  text "TITLE" at 9334,-7811.8 h32
  text "NOTICE" at -7556,-7920 h100
  text "175-00002, CLOCK BOARD" at 9554,-7956 h100
  text "GOLD IMMERSION" at 2905,-7978 h150
  text "PLATING TYPE" at 99,-8011 h150
  text "THIS DRAWING EMBODIES A PROPRIETARY DESIGN OWNED BY LAS CUMBRES" at -7521,-8035 h60
  text "OBSERVATORY.  IT IS SUBMITTED FOR A SPECIFIC PURPOSE UNDER A CON-" at -7521,-8135 h60
  text "SIZE" at 9334,-8141.8 h32
  text "DOC NO." at 9794,-8141.8 h32
  text "REV" at 11874,-8141.8 h32
  text "SHEET" at 12334,-8141.8 h32
  text "FIDENTIAL RELATIONSHIP, AND EXCEPT FOR PURPOSES EXPRESSLY GRANTED" at -7521,-8230 h60
  text "OF" at 12764,-8245 h60
  text "SOLDER MASK COLOR" at 99,-8261 h150
  text "BLACK" at 3524,-8261 h150
  text "1" at 12594,-8265 h100
  text "20" at 12994,-8265 h100
  text "4" at 12019,-8278 h130
  text "-" at 10349,-8280 h130
  text "GPT" at 11068.72,-8294.8 h130
  text "C" at 9469,-8296 h100
  text "IN WRITING, ALL RIGHTS ARE RESERVED BY LAS CUMBRES OBSERVATORY." at -7521,-8320 h60
Mechanical 5:
  text "175-00002 rev4, CLOCK BOARD" at 1644.03,-1236.42 h80
  text "LAS CUMBRES OBSERVATORY     1/2/2013" at 1644.03,-1386.43 h80
Mechanical 13:
  lines w10: 1056.28,-94.72 1056.28,68
Drill Drawing:
  lines w10: -7631,-8396 13369,-8396 13369,7604 -7631,7604 -7631,-8396 ; 9314,-8290 ccw(c9364,-8290) 9364,-8340 9694,-8340 ccw(c9694,-8300) 9734,-8300 9734,-8130 ccw(c9694,-8130) 9694,-8090 9314,-8090 9314,-8290 ; 9314,-8000 ccw(c9364,-8000) 9364,-8050 13264,-8050 ccw(c13264,-8000) 13314,-8000 13314,-7810 ccw(c13264,-7810) 13264,-7760 9314,-7760 9314,-8000 ; 9314,-7680 ccw(c9354,-7680) 9354,-7720 10774,-7720 ccw(c10774,-7670) 10824,-7670 10824,-7520 ccw(c10774,-7520) 10774,-7470 9314,-7470 9314,-7680 ; 9774,-8300 ccw(c9814,-8300) 9814,-8340 11774,-8340 ccw(c11774,-8300) 11814,-8300 11814,-8130 ccw(c11774,-8130) 11774,-8090 9774,-8090 9774,-8300 ; 10864,-7670 ccw(c10914,-7670) 10914,-7720 12324,-7720 ccw(c12324,-7670) 12374,-7670 12374,-7520 ccw(c12324,-7520) 12324,-7470 10864,-7470 10864,-7670 ; 11854,-8290 ccw(c11904,-8290) 11904,-8340 12234,-8340 ccw(c12234,-8300) 12274,-8300 12274,-8130 ccw(c12234,-8130) 12234,-8090 11854,-8090 11854,-8290 ; 12314,-8300 ccw(c12354,-8300) 12354,-8340 13264,-8340 ccw(c13264,-8290) 13314,-8290 13314,-8140 ccw(c13264,-8140) 13264,-8090 12314,-8090 12314,-8300 ; 12414,-7670 ccw(c12464,-7670) 12464,-7720 13264,-7720 ccw(c13264,-7670) 13314,-7670 13314,-7520 ccw(c13264,-7520) 13264,-7470 12414,-7470 12414,-7670
  lines w20: -7605.94,-7765.12 cw(c-7556,-7840) -7556,-7750 -7096,-7750 cw(c-7096,-7840) -7006,-7840 -7006,-7890 ccw(c-6996,-7890) -6996,-7900 -4356,-7900 cw(c-4356,-7990) -4266,-7990 -4266,-8330 cw(c-4356,-8330) -4281.12,-8379.94 ; 9268.92,-8378.66 cw(c9364,-8290) 9234,-8290 9234,-7470 cw(c9314,-7470) 9314,-7390 13264,-7390 cw(c13264,-7520) 13352.66,-7424.92 ; -7606,-8330 ccw(c-7556,-8330) -7556,-8380 -4356,-8380 ccw(c-4356,-8330) -4306,-8330 -4306,-7990 ccw(c-4356,-7990) -4356,-7940 -6996,-7940 cw(c-6996,-7890) -7046,-7890 -7046,-7840 ccw(c-7096,-7840) -7096,-7790 -7556,-7790 ccw(c-7556,-7840) -7606,-7840 -7606,-8330 ; 9274,-8290 ccw(c9364,-8290) 9364,-8380 13264,-8380 ccw(c13264,-8290) 13354,-8290 13354,-7520 ccw(c13264,-7520) 13264,-7430 9314,-7430 ccw(c9314,-7470) 9274,-7470 9274,-8290
  lines w30: -8131,-8896 13869,-8896 13869,8104 -8131,8104 -8131,-8896
  text ".Legend" at 7755,2911 h100
  text "DESIGNED" at 9334,-7521.8 h32
  text "DRAWN" at 10884,-7521.8 h32
  text "SCALE" at 12434,-7521.8 h32
  text "Rich Lobdill" at 9820,-7618 h55
  text "Rich Lobdill" at 11381,-7620 h55
  text "1 : 1" at 12719,-7640 h90
  text "TITLE" at 9334,-7811.8 h32
  text "NOTICE" at -7551,-7935 h100
  text "175-00002, CLOCK BOARD" at 9551,-7956 h100
  text "THIS DRAWING EMBODIES A PROPRIETARY DESIGN OWNED BY LAS CUMBRES" at -7516,-8050 h60
  text "SIZE" at 9334,-8141.8 h32
  text "DOC NO." at 9794,-8141.8 h32
  text "REV" at 11874,-8141.8 h32
  text "SHEET" at 12334,-8141.8 h32
  text "OBSERVATORY.  IT IS SUBMITTED FOR A SPECIFIC PURPOSE UNDER A CON-" at -7516,-8150 h60
  text "FIDENTIAL RELATIONSHIP, AND EXCEPT FOR PURPOSES EXPRESSLY GRANTED" at -7516,-8245 h60
  text "OF" at 12764,-8245 h60
  text "2" at 12579,-8265 h100
  text "20" at 12994,-8265 h100
  text "-" at 10349,-8280 h130
  text "4" at 12014,-8280 h130
  text "C" at 9469,-8296 h120
  text "GD1" at 11169,-8296 h120
  text "IN WRITING, ALL RIGHTS ARE RESERVED BY LAS CUMBRES OBSERVATORY." at -7516,-8335 h60

## Dimensions
4330.71,0 to 4330.71,-393.7 on Mechanical 13
0,0 to 4330.71,-393.7 on Mechanical 2
1085.81,98.43 to -21316.27,-15734.51 on Mechanical 2
0,4000.25 to 5905.51,3980.57 on Mechanical 2
1085.81,98.43 to 1086.61,0 on Mechanical 2
1056.28,-94.72 to 0,0 on Mechanical 2
5905.51,-393.7 to 5905.51,3936.2 on Mechanical 2
4330.71,0 to 4330.71,-393.7 on Mechanical 2

## Text inside footprints (layer, text, board x,y; h text height)
J1: Top Overlay "PC07" at 1078,147 h30 r90; Top Overlay "PC01" at 4020,128 h30 r90; Top Overlay "155" at 1408,168 h30 r90; Top Overlay "1" at 3726,175 h30 r90
P1: Top Overlay "2" at 5687.72,1947.24 h30 r90; Top Overlay "1" at 5787.72,1967.24 h30 r90; Top Overlay "9" at 5787.72,2507.24 h30 r90; Top Overlay "10" at 5687.72,2507.24 h30 r90
P3: Top Overlay "24" at 5685,3835 h30 r90; Top Overlay "23" at 5785,3835 h30 r90; Top Overlay "2" at 5621,2583 h30 r90; Top Overlay "1" at 5811,2583 h30 r90